# EAGLE board X08A-005-A (EAGLE 6.3)
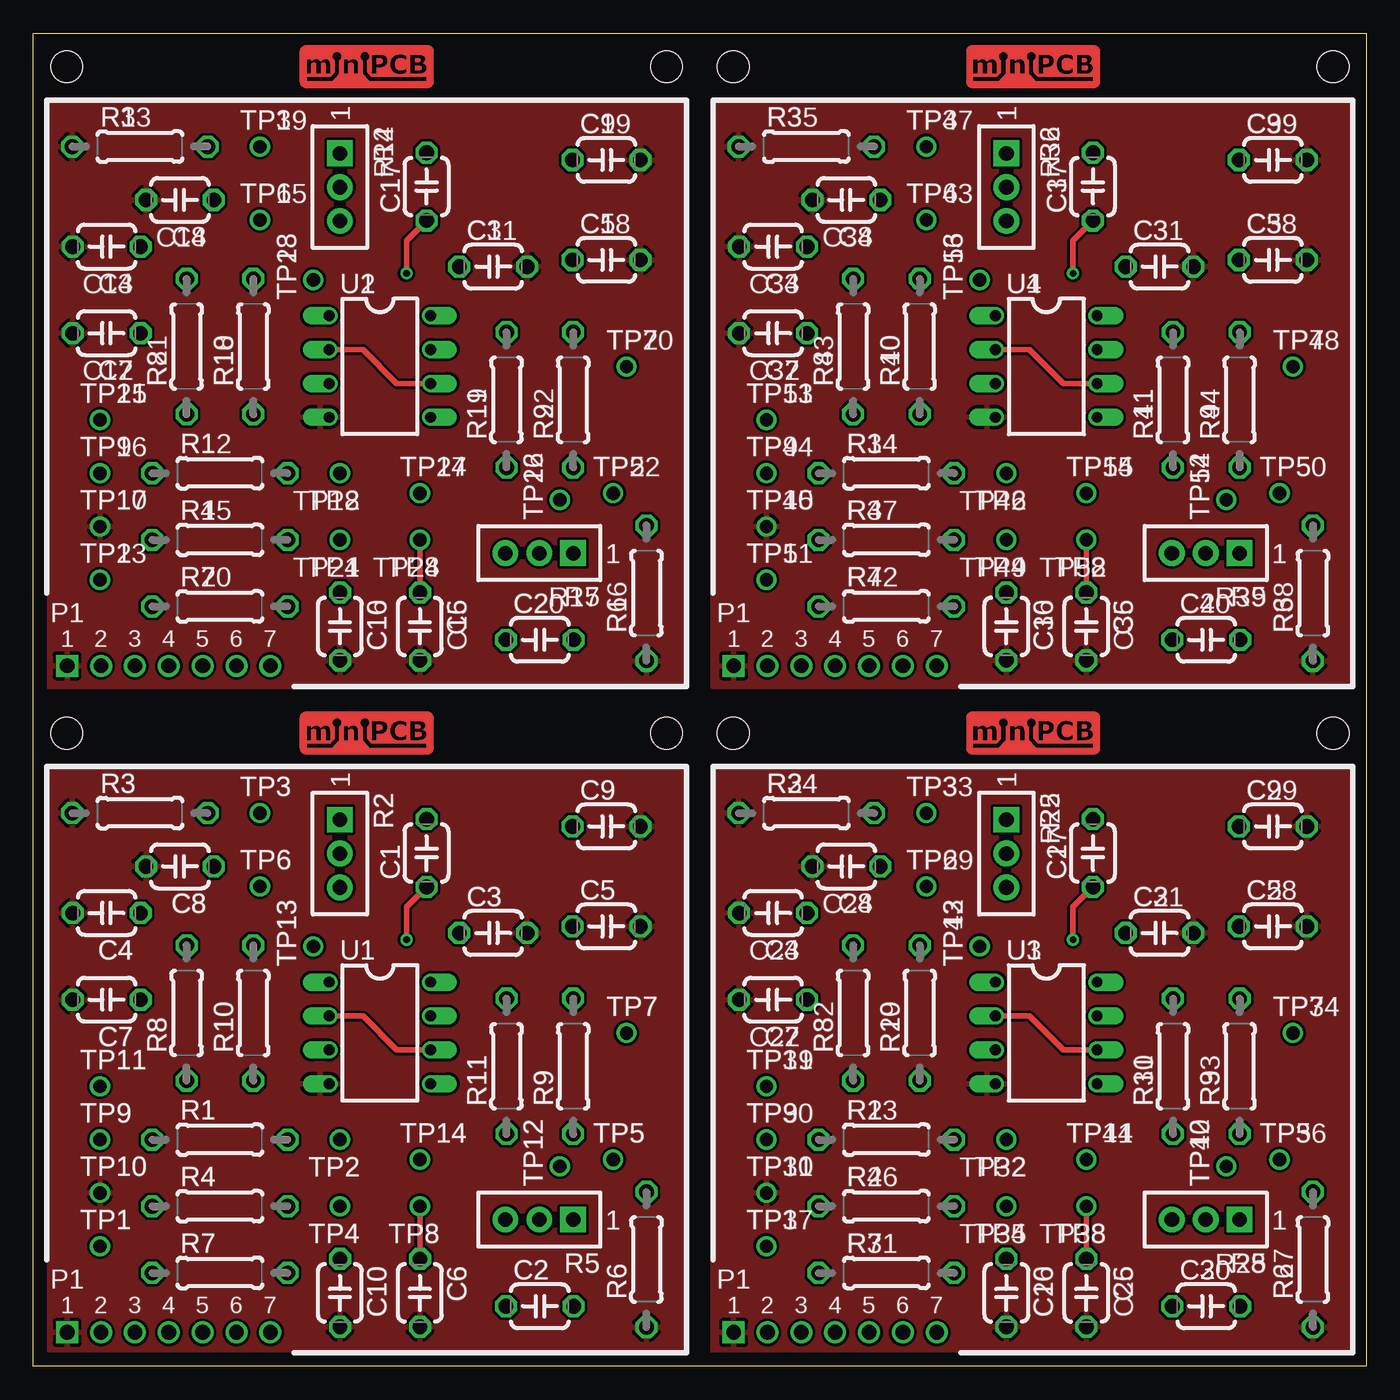
[diagram p0: board, top side]
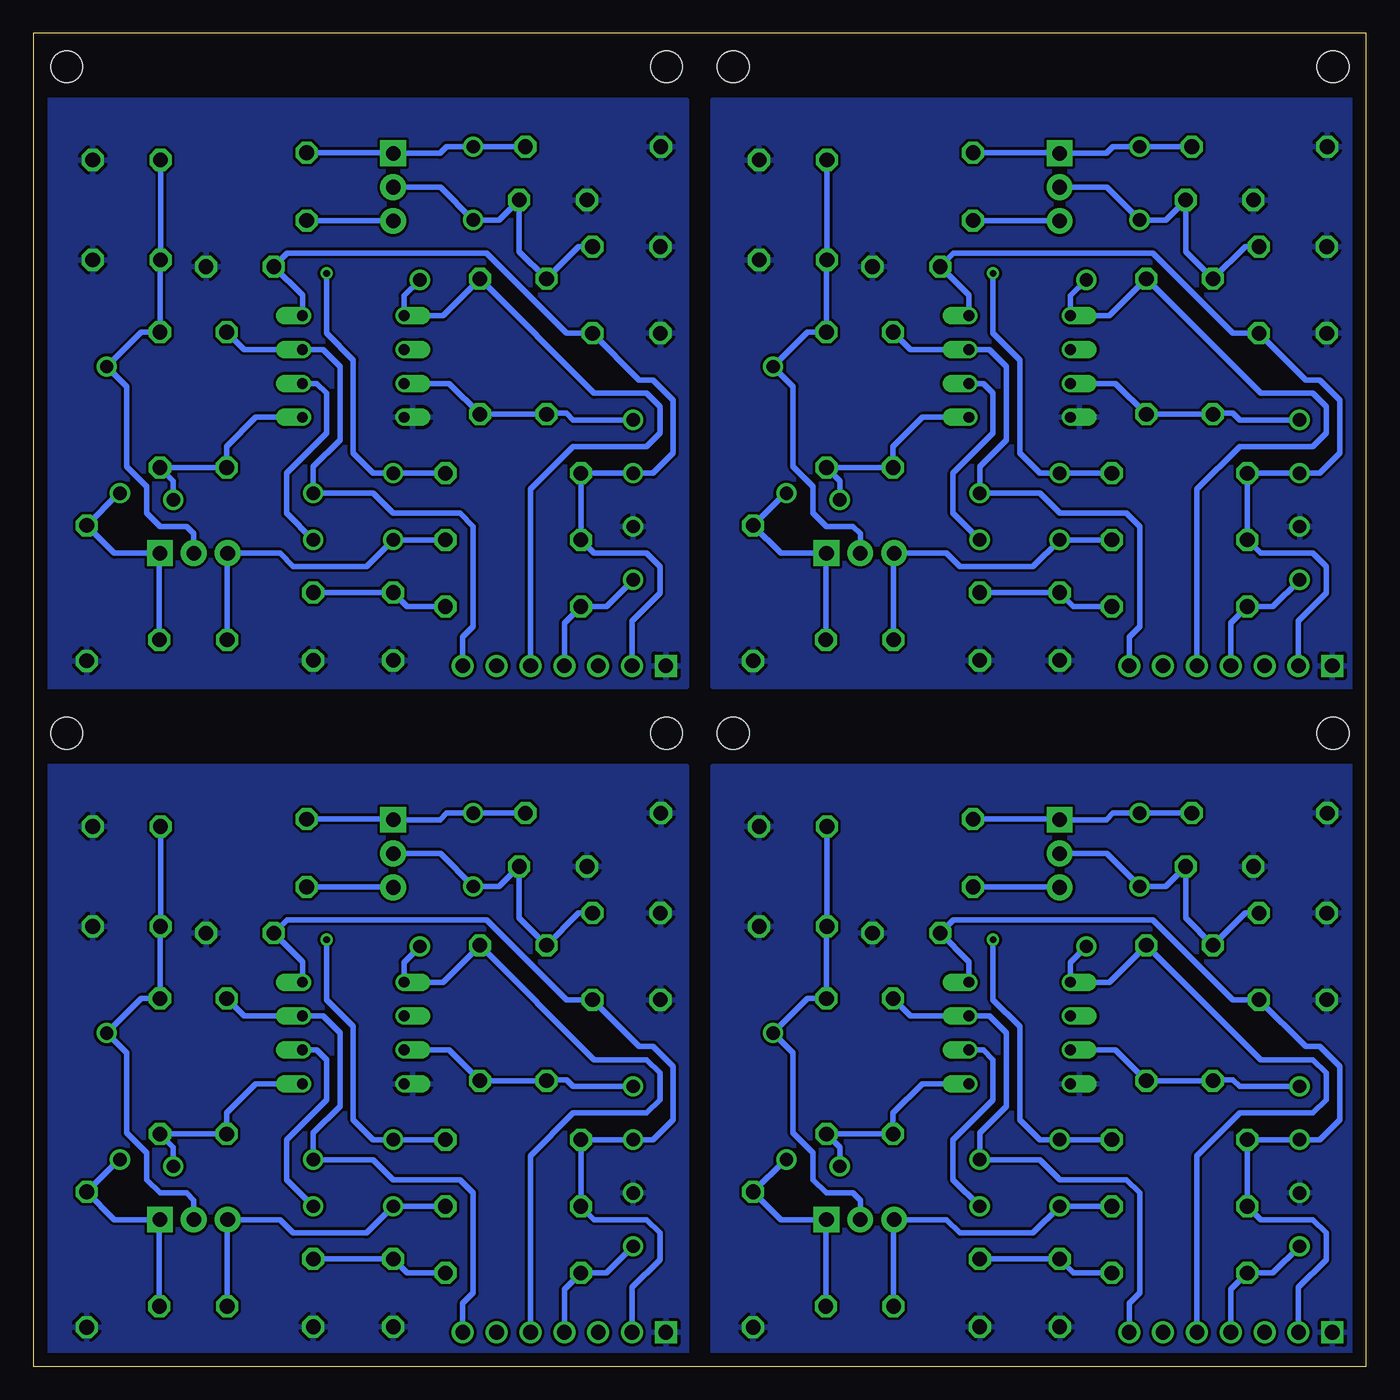
[diagram p1: board, bottom side, seen from below]

Size 100 x 100 mm. Coordinates in mm from the lower left corner, seen from the top.
Outline: 0,0 0,100 100,100 100,0 0,0
Copper layers (1*16): Top 0.035mm / dielectric 1.5mm / Bottom 0.035mm
Design rules "minipcb": minimum track width 10mil, minimum drill 24mil, track to track 8mil, track to pad 8mil, pad to pad 8mil, via to via 8mil, smd to smd 8mil, copper to edge 40mil, drill to drill 8mil, minimum pad ring 10mil, minimum via ring 8mil, stop-mask expansion 4mil, vias tented up to drill 20mil, thermal gap 10mil

## Footprints (pad centres in the part's own frame; a part is rotated, then mirrored left to right if it is on the bottom)
C050-024X044 = drill 1.1 octagon: 1 -2.54,0; 2 2.54,0
MINIPCB_7P_50X50 = drill 1.1 square: 1 2.54,2.54 | drill 1.1: 2 5.08,2.54; 3 7.62,2.54; 4 10.16,2.54; 5 12.7,2.54; 6 15.24,2.54; 7 17.78,2.54 | hole 2.4: 47.5,47.5; 2.5,47.5
0207/10 = drill 1.1 octagon: 1 -5.08,0; 2 5.08,0
TRIM_0100 = drill 1.1 pad 1.93 square: 1 0,0 | drill 1.1 pad 1.93: 2 2.54,0; 3 5.08,0
PINS_1_TESTPOINT_KE5000_NOTEXT = drill 1: 1 0,0
DIL08 = drill 0.813 offset: 1 -3.81,-3.81; 2 -1.27,-3.81; 3 1.27,-3.81; 4 3.81,-3.81; 5 3.81,3.81; 6 1.27,3.81; 7 -1.27,3.81; 8 -3.81,3.81

## Placement (x,y rotation side)
C1  [C050-024X044]  29.5,38.5 90 top
C2  [C050-024X044]  38,4.5 0 top
C3  [C050-024X044]  34.5,32.5 0 top
C4  [C050-024X044]  5.5,34 180 top
C5  [C050-024X044]  43,33 0 top
C6  [C050-024X044]  29,5.5 270 top
C7  [C050-024X044]  5.5,27.5 180 top
C8  [C050-024X044]  11,37.5 180 top
C9  [C050-024X044]  43,40.5 0 top
C10  [C050-024X044]  23,5.5 270 top
C11  [C050-024X044]  34.5,82.5 0 top
C12  [C050-024X044]  5.5,77.5 180 top
C13  [C050-024X044]  5.5,84 180 top
C14  [C050-024X044]  11,87.5 180 top
C15  [C050-024X044]  29,55.5 270 top
C16  [C050-024X044]  23,55.5 270 top
C17  [C050-024X044]  29.5,88.5 90 top
C18  [C050-024X044]  43,83 0 top
C19  [C050-024X044]  43,90.5 0 top
C20  [C050-024X044]  38,54.5 0 top
C21  [C050-024X044]  84.5,32.5 0 top
C22  [C050-024X044]  55.5,27.5 180 top
C23  [C050-024X044]  55.5,34 180 top
C24  [C050-024X044]  61,37.5 180 top
C25  [C050-024X044]  79,5.5 270 top
C26  [C050-024X044]  73,5.5 270 top
C27  [C050-024X044]  79.5,38.5 90 top
C28  [C050-024X044]  93,33 0 top
C29  [C050-024X044]  93,40.5 0 top
C30  [C050-024X044]  88,4.5 0 top
C31  [C050-024X044]  84.5,82.5 0 top
C32  [C050-024X044]  55.5,77.5 180 top
C33  [C050-024X044]  55.5,84 180 top
C34  [C050-024X044]  61,87.5 180 top
C35  [C050-024X044]  79,55.5 270 top
C36  [C050-024X044]  73,55.5 270 top
C37  [C050-024X044]  79.5,88.5 90 top
C38  [C050-024X044]  93,83 0 top
C39  [C050-024X044]  93,90.5 0 top
C40  [C050-024X044]  88,54.5 0 top
E$1  [MINIPCB_PANEL_IMAGEFRAME]  -25.4,-31.75 0 top  (outside the outline)
P1-  [MINIPCB_7P_50X50]  0,0 0 top
P1-1  [MINIPCB_7P_50X50]  0,50 0 top
P1-2  [MINIPCB_7P_50X50]  50,0 0 top
P1-3  [MINIPCB_7P_50X50]  50,50 0 top
R1  [0207/10]  14,17 0 top
R2  [TRIM_0100]  23,41 270 top
R3  [0207/10]  8,41.5 0 top
R4  [0207/10]  14,12 0 top
R5  [TRIM_0100]  40.5,11 180 top
R6  [0207/10]  46,8 90 top
R7  [0207/10]  14,7 0 top
R8  [0207/10]  11.5,26.5 90 top
R9  [0207/10]  40.5,22.5 90 top
R10  [0207/10]  16.5,26.5 90 top
R11  [0207/10]  35.5,22.5 90 top
R12  [0207/10]  14,67 0 top
R13  [0207/10]  8,91.5 0 top
R14  [TRIM_0100]  23,91 270 top
R15  [0207/10]  14,62 0 top
R16  [0207/10]  46,58 90 top
R17  [TRIM_0100]  40.5,61 180 top
R18  [0207/10]  16.5,76.5 90 top
R19  [0207/10]  35.5,72.5 90 top
R20  [0207/10]  14,57 0 top
R21  [0207/10]  11.5,76.5 90 top
R22  [0207/10]  40.5,72.5 90 top
R23  [0207/10]  64,17 0 top
R24  [0207/10]  58,41.5 0 top
R25  [TRIM_0100]  73,41 270 top
R26  [0207/10]  64,12 0 top
R27  [0207/10]  96,8 90 top
R28  [TRIM_0100]  90.5,11 180 top
R29  [0207/10]  66.5,26.5 90 top
R30  [0207/10]  85.5,22.5 90 top
R31  [0207/10]  64,7 0 top
R32  [0207/10]  61.5,26.5 90 top
R33  [0207/10]  90.5,22.5 90 top
R34  [0207/10]  64,67 0 top
R35  [0207/10]  58,91.5 0 top
R36  [TRIM_0100]  73,91 270 top
R37  [0207/10]  64,62 0 top
R38  [0207/10]  96,58 90 top
R39  [TRIM_0100]  90.5,61 180 top
R40  [0207/10]  66.5,76.5 90 top
R41  [0207/10]  85.5,72.5 90 top
R42  [0207/10]  64,57 0 top
R43  [0207/10]  61.5,76.5 90 top
R44  [0207/10]  90.5,72.5 90 top
TP1  [PINS_1_TESTPOINT_KE5000_NOTEXT]  5,9 0 top
TP2  [PINS_1_TESTPOINT_KE5000_NOTEXT]  23,17 180 top
TP3  [PINS_1_TESTPOINT_KE5000_NOTEXT]  17,41.5 0 top
TP4  [PINS_1_TESTPOINT_KE5000_NOTEXT]  23,12 180 top
TP5  [PINS_1_TESTPOINT_KE5000_NOTEXT]  43.5,15.5 0 top
TP6  [PINS_1_TESTPOINT_KE5000_NOTEXT]  17,36 0 top
TP7  [PINS_1_TESTPOINT_KE5000_NOTEXT]  44.5,25 0 top
TP8  [PINS_1_TESTPOINT_KE5000_NOTEXT]  29,12 180 top
TP9  [PINS_1_TESTPOINT_KE5000_NOTEXT]  5,17 0 top
TP10  [PINS_1_TESTPOINT_KE5000_NOTEXT]  5,13 0 top
TP11  [PINS_1_TESTPOINT_KE5000_NOTEXT]  5,21 0 top
TP12  [PINS_1_TESTPOINT_KE5000_NOTEXT]  39.5,15 90 top
TP13  [PINS_1_TESTPOINT_KE5000_NOTEXT]  21,31.5 90 top
TP14  [PINS_1_TESTPOINT_KE5000_NOTEXT]  29,15.5 0 top
TP15  [PINS_1_TESTPOINT_KE5000_NOTEXT]  17,86 0 top
TP16  [PINS_1_TESTPOINT_KE5000_NOTEXT]  5,67 0 top
TP17  [PINS_1_TESTPOINT_KE5000_NOTEXT]  5,63 0 top
TP18  [PINS_1_TESTPOINT_KE5000_NOTEXT]  23,67 180 top
TP19  [PINS_1_TESTPOINT_KE5000_NOTEXT]  17,91.5 0 top
TP20  [PINS_1_TESTPOINT_KE5000_NOTEXT]  44.5,75 0 top
TP21  [PINS_1_TESTPOINT_KE5000_NOTEXT]  23,62 180 top
TP22  [PINS_1_TESTPOINT_KE5000_NOTEXT]  43.5,65.5 0 top
TP23  [PINS_1_TESTPOINT_KE5000_NOTEXT]  5,59 0 top
TP24  [PINS_1_TESTPOINT_KE5000_NOTEXT]  29,62 180 top
TP25  [PINS_1_TESTPOINT_KE5000_NOTEXT]  5,71 0 top
TP26  [PINS_1_TESTPOINT_KE5000_NOTEXT]  39.5,65 90 top
TP27  [PINS_1_TESTPOINT_KE5000_NOTEXT]  29,65.5 0 top
TP28  [PINS_1_TESTPOINT_KE5000_NOTEXT]  21,81.5 90 top
TP29  [PINS_1_TESTPOINT_KE5000_NOTEXT]  67,36 0 top
TP30  [PINS_1_TESTPOINT_KE5000_NOTEXT]  55,17 0 top
TP31  [PINS_1_TESTPOINT_KE5000_NOTEXT]  55,13 0 top
TP32  [PINS_1_TESTPOINT_KE5000_NOTEXT]  73,17 180 top
TP33  [PINS_1_TESTPOINT_KE5000_NOTEXT]  67,41.5 0 top
TP34  [PINS_1_TESTPOINT_KE5000_NOTEXT]  94.5,25 0 top
TP35  [PINS_1_TESTPOINT_KE5000_NOTEXT]  73,12 180 top
TP36  [PINS_1_TESTPOINT_KE5000_NOTEXT]  93.5,15.5 0 top
TP37  [PINS_1_TESTPOINT_KE5000_NOTEXT]  55,9 0 top
TP38  [PINS_1_TESTPOINT_KE5000_NOTEXT]  79,12 180 top
TP39  [PINS_1_TESTPOINT_KE5000_NOTEXT]  55,21 0 top
TP40  [PINS_1_TESTPOINT_KE5000_NOTEXT]  89.5,15 90 top
TP41  [PINS_1_TESTPOINT_KE5000_NOTEXT]  79,15.5 0 top
TP42  [PINS_1_TESTPOINT_KE5000_NOTEXT]  71,31.5 90 top
TP43  [PINS_1_TESTPOINT_KE5000_NOTEXT]  67,86 0 top
TP44  [PINS_1_TESTPOINT_KE5000_NOTEXT]  55,67 0 top
TP45  [PINS_1_TESTPOINT_KE5000_NOTEXT]  55,63 0 top
TP46  [PINS_1_TESTPOINT_KE5000_NOTEXT]  73,67 180 top
TP47  [PINS_1_TESTPOINT_KE5000_NOTEXT]  67,91.5 0 top
TP48  [PINS_1_TESTPOINT_KE5000_NOTEXT]  94.5,75 0 top
TP49  [PINS_1_TESTPOINT_KE5000_NOTEXT]  73,62 180 top
TP50  [PINS_1_TESTPOINT_KE5000_NOTEXT]  93.5,65.5 0 top
TP51  [PINS_1_TESTPOINT_KE5000_NOTEXT]  55,59 0 top
TP52  [PINS_1_TESTPOINT_KE5000_NOTEXT]  79,62 180 top
TP53  [PINS_1_TESTPOINT_KE5000_NOTEXT]  55,71 0 top
TP54  [PINS_1_TESTPOINT_KE5000_NOTEXT]  89.5,65 90 top
TP55  [PINS_1_TESTPOINT_KE5000_NOTEXT]  79,65.5 0 top
TP56  [PINS_1_TESTPOINT_KE5000_NOTEXT]  71,81.5 90 top
U1  [DIL08]  26,25 270 top
U2  [DIL08]  26,75 270 top
U3  [DIL08]  76,25 270 top
U4  [DIL08]  76,75 270 top

## Library data of the parts
C1-C40 E$1 R1-R44 TP1-TP56 U1-U4 = minipcb
P1- P1-1-P1-3 = minipcb; PART_NUMBER: X08A-005-A; REVISION: A

## Nets
BIASA: C4.1 C8.1 R2.2 R8.2 TP6.1
BIASA1: C13.1 C14.1 R14.2 R21.2 TP15.1
BIASA2: C23.1 C24.1 R25.2 R32.2 TP29.1
BIASA3: C33.1 C34.1 R36.2 R43.2 TP43.1
BIASB: C5.1 C9.1 R5.2 R9.2 TP7.1
BIASB1: C18.1 C19.1 R17.2 R22.2 TP20.1
BIASB2: C28.1 C29.1 R28.2 R33.2 TP34.1
BIASB3: C38.1 C39.1 R39.2 R44.2 TP48.1
GND: C3.2 C4.2 C5.2 C6.2 C7.2 C8.2 C9.2 C10.2 P1-.1 R3.1 R6.1 TP10.1 U1.4
GND1: C11.2 C12.2 C13.2 C14.2 C15.2 C16.2 C18.2 C19.2 P1-1.1 R13.1 R16.1 TP17.1 U2.4
GND2: C21.2 C22.2 C23.2 C24.2 C25.2 C26.2 C28.2 C29.2 P1-2.1 R24.1 R27.1 TP31.1 U3.4
GND3: C31.2 C32.2 C33.2 C34.2 C35.2 C36.2 C38.2 C39.2 P1-3.1 R35.1 R38.1 TP45.1 U4.4
IN: P1-.4 R7.1 TP1.1
IN1: P1-1.4 R20.1 TP23.1
IN2: P1-2.4 R31.1 TP37.1
IN3: P1-3.4 R42.1 TP51.1
IN-4: C6.1 C10.1 R7.2 TP8.1 U1.2 U1.6
IN-5: C15.1 C16.1 R20.2 TP24.1 U2.2 U2.6
IN-6: C25.1 C26.1 R31.2 TP38.1 U3.2 U3.6
IN-7: C35.1 C36.1 R42.2 TP52.1 U4.2 U4.6
INA+: R8.1 R10.1 TP11.1 U1.3
INA+1: R18.1 R21.1 TP25.1 U2.3
INA+2: R29.1 R32.1 TP39.1 U3.3
INA+3: R40.1 R43.1 TP53.1 U4.3
INB+: R9.1 R11.1 TP12.1 U1.5
INB+1: R19.1 R22.1 TP26.1 U2.5
INB+2: R30.1 R33.1 TP40.1 U3.5
INB+3: R41.1 R44.1 TP54.1 U4.5
OUTA: P1-.5 R10.2 TP13.1 U1.1
OUTA1: P1-1.5 R18.2 TP28.1 U2.1
OUTA2: P1-2.5 R29.2 TP42.1 U3.1
OUTA3: P1-3.5 R40.2 TP56.1 U4.1
OUTB: P1-.7 R11.2 TP14.1 U1.7
OUTB1: P1-1.7 R19.2 TP27.1 U2.7
OUTB2: P1-2.7 R30.2 TP41.1 U3.7
OUTB3: P1-3.7 R41.2 TP55.1 U4.7
R2.1: C1.1 R1.2 R2.3 TP2.1
R2.4: C1.2 R2.1 R3.2 TP3.1
R2.6: C17.1 R12.2 R14.3 TP18.1
R2.8: C17.2 R13.2 R14.1 TP19.1
R2.9: C27.1 R23.2 R25.3 TP32.1
R2.10: C27.2 R24.2 R25.1 TP33.1
R2.11: C37.1 R34.2 R36.3 TP46.1
R2.12: C37.2 R35.2 R36.1 TP47.1
R5.1: C2.2 R5.1 R6.2 TP5.1
R5.2: C20.1 R15.2 R17.3 TP21.1
R5.3: C2.1 R4.2 R5.3 TP4.1
R5.4: C20.2 R16.2 R17.1 TP22.1
R5.5: C30.1 R26.2 R28.3 TP35.1
R5.6: C30.2 R27.2 R28.1 TP36.1
R5.7: C40.1 R37.2 R39.3 TP49.1
R5.8: C40.2 R38.2 R39.1 TP50.1
V+: C3.1 C7.1 P1-.2 R1.1 R4.1 TP9.1 U1.8
V+1: C11.1 C12.1 P1-1.2 R12.1 R15.1 TP16.1 U2.8
V+2: C21.1 C22.1 P1-2.2 R23.1 R26.1 TP30.1 U3.8
V+3: C31.1 C32.1 P1-3.2 R34.1 R37.1 TP44.1 U4.8

## Tracks (layer width: path | path; a pad name or v marks a point on that pad's centre or on a via)
BIASA
  Bottom 0.406: C4.1 9.08,34 R8.2 13.54,33.62 C8.1 15.04,36 TP6.1 19.46,38.46 R2.2
BIASA1
  Bottom 0.406: C13.1 9.08,84 R21.2 13.54,83.62 C14.1 15.04,86 TP15.1 19.46,88.46 R14.2
BIASA2
  Bottom 0.406: C23.1 59.08,34 R32.2 63.54,33.62 C24.1 65.04,36 TP29.1 69.46,38.46 R25.2
BIASA3
  Bottom 0.406: C33.1 59.08,84 R43.2 63.54,83.62 C34.1 65.04,86 TP43.1 69.46,88.46 R36.2
BIASB
  Bottom 0.406: R5.2 37.96,12.46 38.5,13 40.5,13 41.5,14 41.5,16 43,17.5 43,23.5 TP7.1 41.92,27.58 R9.2 40.5,32.96 C5.1 C9.1
BIASB1
  Bottom 0.406: R17.2 37.96,62.46 38.5,63 40.5,63 41.5,64 41.5,66 43,67.5 43,73.5 TP20.1 41.92,77.58 R22.2 40.5,82.96 C18.1 C19.1
BIASB2
  Bottom 0.406: R28.2 87.96,12.46 88.5,13 90.5,13 91.5,14 91.5,16 93,17.5 93,23.5 TP34.1 91.92,27.58 R33.2 90.5,32.96 C28.1 C29.1
BIASB3
  Bottom 0.406: R39.2 87.96,62.46 88.5,63 90.5,63 91.5,64 91.5,66 93,67.5 93,73.5 TP48.1 91.92,77.58 R44.2 90.5,82.96 C38.1 C39.1
GND
  pour Bottom: 1,1 49,1 49,45 2,45 1,45
  pour Top: 1,1 49,1 49,45 2,45 1,45
GND1
  pour Bottom: 1,51 49,51 49,95 2,95 1,95
  pour Top: 1,51 49,51 49,95 2,95 1,95
GND2
  pour Bottom: 51,1 99,1 99,45 52,45 51,45
  pour Top: 51,1 99,1 99,45 52,45 51,45
GND3
  pour Bottom: 51,51 99,51 99,95 52,95 51,95
  pour Top: 51,51 99,51 99,95 52,95 51,95
IN
  Bottom 0.406: P1-.4 10.16,5.76 R7.1 7,7 TP1.1
IN1
  Bottom 0.406: P1-1.4 10.16,55.76 R20.1 7,57 TP23.1
IN2
  Bottom 0.406: P1-2.4 60.16,5.76 R31.1 57,7 TP37.1
IN3
  Bottom 0.406: P1-3.4 60.16,55.76 R42.1 57,57 TP51.1
IN-4
  Top 0.406: C6.1 TP8.1 | U1.2 24.73,26.27 27.27,23.73 U1.6
  Bottom 0.406: R7.2 21.96,7 C10.1 C6.1 | TP8.1 31,14 31,17 28,20 28,23 28.73,23.73 U1.6
IN-5
  Top 0.406: C15.1 TP24.1 | U2.2 24.73,76.27 27.27,73.73 U2.6
  Bottom 0.406: R20.2 21.96,57 C16.1 C15.1 | TP24.1 31,64 31,67 28,70 28,73 28.73,73.73 U2.6
IN-6
  Top 0.406: C25.1 TP38.1 | U3.2 74.73,26.27 77.27,23.73 U3.6
  Bottom 0.406: R31.2 71.96,7 C26.1 C25.1 | TP38.1 81,14 81,17 78,20 78,23 78.73,23.73 U3.6
IN-7
  Top 0.406: C35.1 TP52.1 | U4.2 74.73,76.27 77.27,73.73 U4.6
  Bottom 0.406: R42.2 71.96,57 C36.1 C35.1 | TP52.1 81,64 81,67 78,70 78,73 78.73,73.73 U4.6
INA+
  Bottom 0.406: U1.3 18.81,23.73 R10.1 R8.1 11.42,21.5 10,21.5 9.5,21 TP11.1
INA+1
  Bottom 0.406: U2.3 18.81,73.73 R18.1 R21.1 11.42,71.5 10,71.5 9.5,71 TP25.1
INA+2
  Bottom 0.406: U3.3 68.81,23.73 R29.1 R32.1 61.42,21.5 60,21.5 59.5,21 TP39.1
INA+3
  Bottom 0.406: U4.3 68.81,73.73 R40.1 R43.1 61.42,71.5 60,71.5 59.5,71 TP53.1
INB+
  Bottom 0.406: U1.5 33.31,21.19 35.5,19 R11.1 R9.1 39.5,16.42 TP12.1
INB+1
  Bottom 0.406: U2.5 33.31,71.19 35.5,69 R19.1 R22.1 39.5,66.42 TP26.1
INB+2
  Bottom 0.406: U3.5 83.31,21.19 85.5,19 R30.1 R33.1 89.5,16.42 TP40.1
INB+3
  Bottom 0.406: U4.5 83.31,71.19 85.5,69 R41.1 R44.1 89.5,66.42 TP54.1
OUTA
  Bottom 0.406: P1-.5 12.7,15.8 9.5,19 4,19 3,20 3,22 4,23 7.92,23 R10.2 19.27,28.81 U1.1 22.19,30.31 TP13.1
OUTA1
  Bottom 0.406: P1-1.5 12.7,65.8 9.5,69 4,69 3,70 3,72 4,73 7.92,73 R18.2 19.27,78.81 U2.1 22.19,80.31 TP28.1
OUTA2
  Bottom 0.406: P1-2.5 62.7,15.8 59.5,19 54,19 53,20 53,22 54,23 57.92,23 R29.2 69.27,28.81 U3.1 72.19,30.31 TP42.1
OUTA3
  Bottom 0.406: P1-3.5 62.7,65.8 59.5,69 54,69 53,70 53,72 54,73 57.92,73 R40.2 69.27,78.81 U4.1 72.19,80.31 TP56.1
OUTB
  Bottom 0.406: P1-.7 17.78,4.72 17,5.5 17,13 18,14 23,14 24.5,15.5 TP14.1 29,17.5 27,19.5 27,25 28.27,26.27 U1.7 34.19,26.27 R11.2
OUTB1
  Bottom 0.406: P1-1.7 17.78,54.72 17,55.5 17,63 18,64 23,64 24.5,65.5 TP27.1 29,67.5 27,69.5 27,75 28.27,76.27 U2.7 34.19,76.27 R19.2
OUTB2
  Bottom 0.406: P1-2.7 67.78,4.72 67,5.5 67,13 68,14 73,14 74.5,15.5 TP41.1 79,17.5 77,19.5 77,25 78.27,26.27 U3.7 84.19,26.27 R30.2
OUTB3
  Bottom 0.406: P1-3.7 67.78,54.72 67,55.5 67,63 68,64 73,64 74.5,65.5 TP55.1 79,67.5 77,69.5 77,75 78.27,76.27 U4.7 84.19,76.27 R41.2
R2.1  (via drill 0.5)
  Top 0.406: v28,32 28,34.46 C1.1
  Bottom 0.406: R2.3 23.04,35.96 C1.1 | R1.2 TP2.1 24.5,17 26,18.5 26,25.5 28,27.5 v28,32
R2.4
  Bottom 0.406: R3.2 TP3.1 19,41.5 19.5,41 R2.1 23.04,41.04 C1.2
R2.6  (via drill 0.5)
  Top 0.406: v28,82 28,84.46 C17.1
  Bottom 0.406: R14.3 23.04,85.96 C17.1 | R12.2 TP18.1 24.5,67 26,68.5 26,75.5 28,77.5 v28,82
R2.8
  Bottom 0.406: R13.2 TP19.1 19,91.5 19.5,91 R14.1 23.04,91.04 C17.2
R2.9  (via drill 0.5)
  Top 0.406: v78,32 78,34.46 C27.1
  Bottom 0.406: R25.3 73.04,35.96 C27.1 | R23.2 TP32.1 74.5,17 76,18.5 76,25.5 78,27.5 v78,32
R2.10
  Bottom 0.406: R24.2 TP33.1 69,41.5 69.5,41 R25.1 73.04,41.04 C27.2
R2.11  (via drill 0.5)
  Top 0.406: v78,82 78,84.46 C37.1
  Bottom 0.406: R36.3 73.04,85.96 C37.1 | R34.2 TP46.1 74.5,67 76,68.5 76,75.5 78,77.5 v78,82
R2.12
  Bottom 0.406: R35.2 TP47.1 69,91.5 69.5,91 R36.1 73.04,91.04 C37.2
R5.1
  Bottom 0.406: C2.2 40.54,10.96 R5.1 43.92,11 R6.2 43.58,15.5 TP5.1
R5.2
  Bottom 0.406: R15.2 TP21.1 25,60 30.5,60 31.5,61 R17.3 35.46,60.96 C20.1
R5.3
  Bottom 0.406: R4.2 TP4.1 25,10 30.5,10 31.5,11 R5.3 35.46,10.96 C2.1
R5.4
  Bottom 0.406: C20.2 40.54,60.96 R17.1 43.92,61 R16.2 43.58,65.5 TP22.1
R5.5
  Bottom 0.406: R26.2 TP35.1 75,10 80.5,10 81.5,11 R28.3 85.46,10.96 C30.1
R5.6
  Bottom 0.406: C30.2 90.54,10.96 R28.1 93.92,11 R27.2 93.58,15.5 TP36.1
R5.7
  Bottom 0.406: R37.2 TP49.1 75,60 80.5,60 81.5,61 R39.3 85.46,60.96 C40.1
R5.8
  Bottom 0.406: C40.2 90.54,60.96 R39.1 93.92,61 R38.2 93.58,65.5 TP50.1
V+
  Bottom 0.406: P1-.2 5.08,5.92 3,8 3,10 4,11 7.92,11 R4.1 R1.1 TP9.1 3.5,17 2,18.5 2,22.5 3.5,24 4.54,24 C7.1 10,27.5 16,33.5 30.96,33.5 C3.1 29.81,30.35 U1.8
V+1
  Bottom 0.406: P1-1.2 5.08,55.92 3,58 3,60 4,61 7.92,61 R15.1 R12.1 TP16.1 3.5,67 2,68.5 2,72.5 3.5,74 4.54,74 C12.1 10,77.5 16,83.5 30.96,83.5 C11.1 29.81,80.35 U2.8
V+2
  Bottom 0.406: P1-2.2 55.08,5.92 53,8 53,10 54,11 57.92,11 R26.1 R23.1 TP30.1 53.5,17 52,18.5 52,22.5 53.5,24 54.54,24 C22.1 60,27.5 66,33.5 80.96,33.5 C21.1 79.81,30.35 U3.8
V+3
  Bottom 0.406: P1-3.2 55.08,55.92 53,58 53,60 54,61 57.92,61 R37.1 R34.1 TP44.1 53.5,67 52,68.5 52,72.5 53.5,74 54.54,74 C32.1 60,77.5 66,83.5 80.96,83.5 C31.1 79.81,80.35 U4.8

## Text on the board
_tNames: R3 | TP3 | R2 | R3 | TP3 | R2 | C9 | C9 | TP6 | C1 | TP6 | C1 | C8 | C8 | C3 | C5 | C3 | C5 | C4 | C4 | TP13 | U1 | TP13 | U1 | C7 | TP7 | C7 | TP7 | R8 | R10 | R8 | R10 | TP11 | TP11 | R11 | R9 | R11 | R9 | TP9 | R1 | TP9 | R1 | TP14 | TP5 | TP14 | TP5 | TP2 | TP2 | TP10 | TP10 | R4 | TP12 | R4 | TP12 | TP4 | TP8 | TP4 | TP8 | TP1 | TP1 | R7 | R5 | R7 | R5 | C10 | C6 | C10 | C6 | C2 | C2 | R6 | R6 | R3 | TP3 | R2 | R3 | TP3 | R2 | C9 | C9 | TP6 | C1 | TP6 | C1 | C8 | C8 | C3 | C5 | C3 | C5 | C4 | C4 | TP13 | U1 | TP13 | U1 | C7 | TP7 | C7 | TP7 | R8 | R10 | R8 | R10 | TP11 | TP11 | R11 | R9 | R11 | R9 | TP9 | R1 | TP9 | R1 | TP14 | TP5 | TP14 | TP5 | TP2 | TP2 | TP10 | TP10 | R4 | TP12 | R4 | TP12 | TP4 | TP8 | TP4 | TP8 | TP1 | TP1 | R7 | R5 | R7 | R5 | C10 | C6 | C10 | C6 | C2 | C2 | R6 | R6